# Altium PCB Filter-5.PcbDoc
Units mil, origin at the board's own origin, x right, y up, seen from the top; angles counter-clockwise.
Board outline 2425 x 1230 mil, 2 copper layers (Top Layer, Bottom Layer); 4 components, 3 nets, 8 pads, 1 vias.
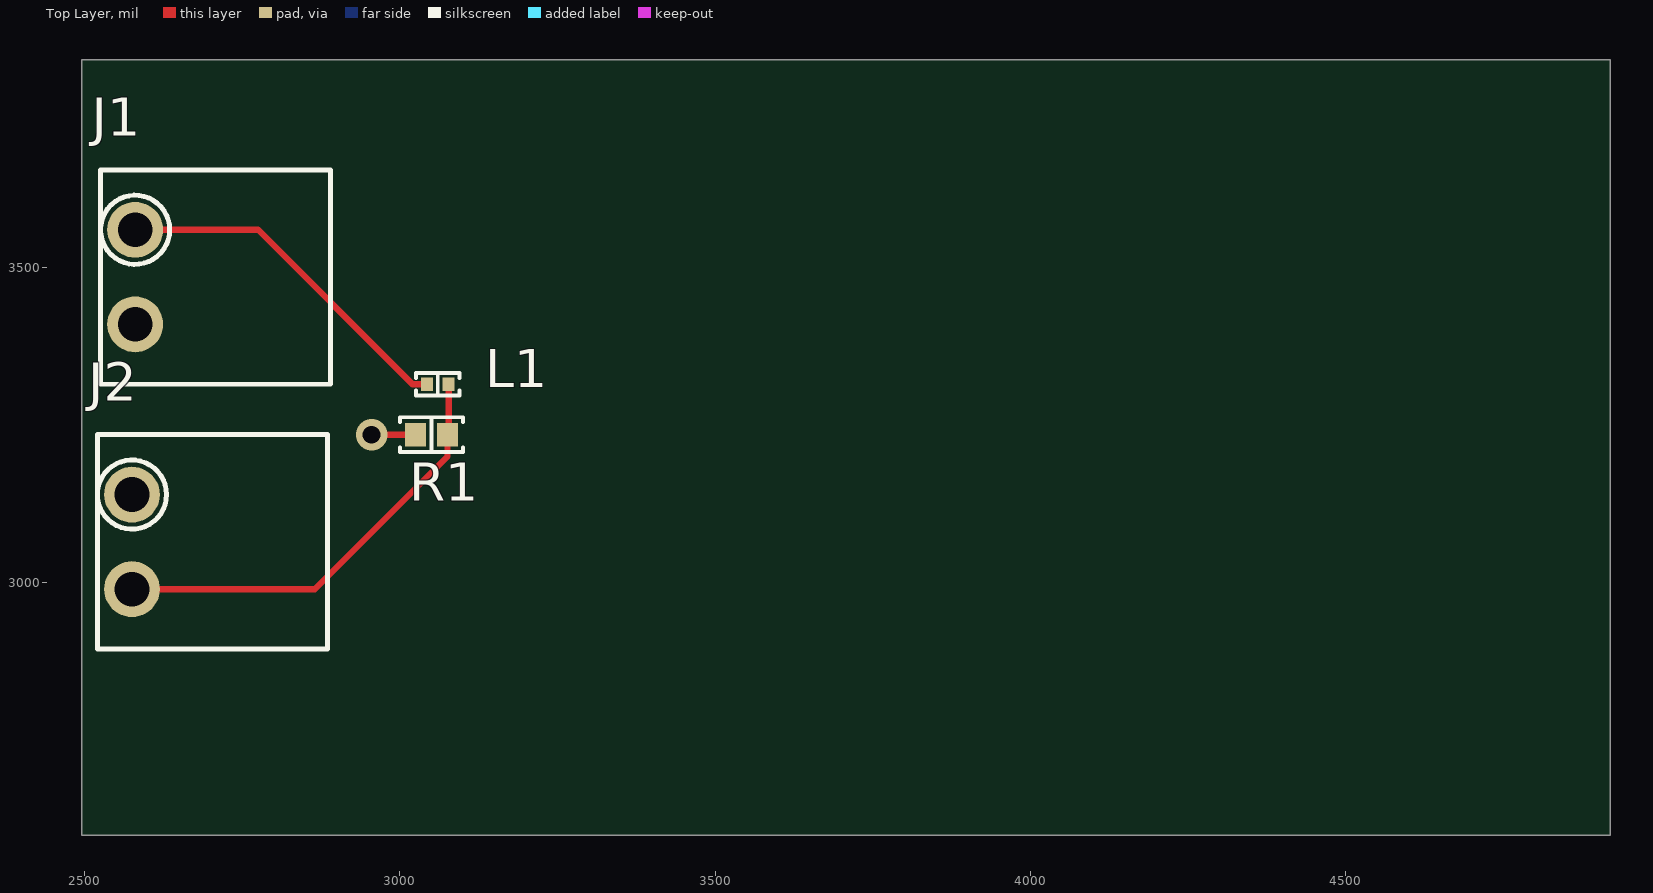
[diagram p0: Top Layer view]
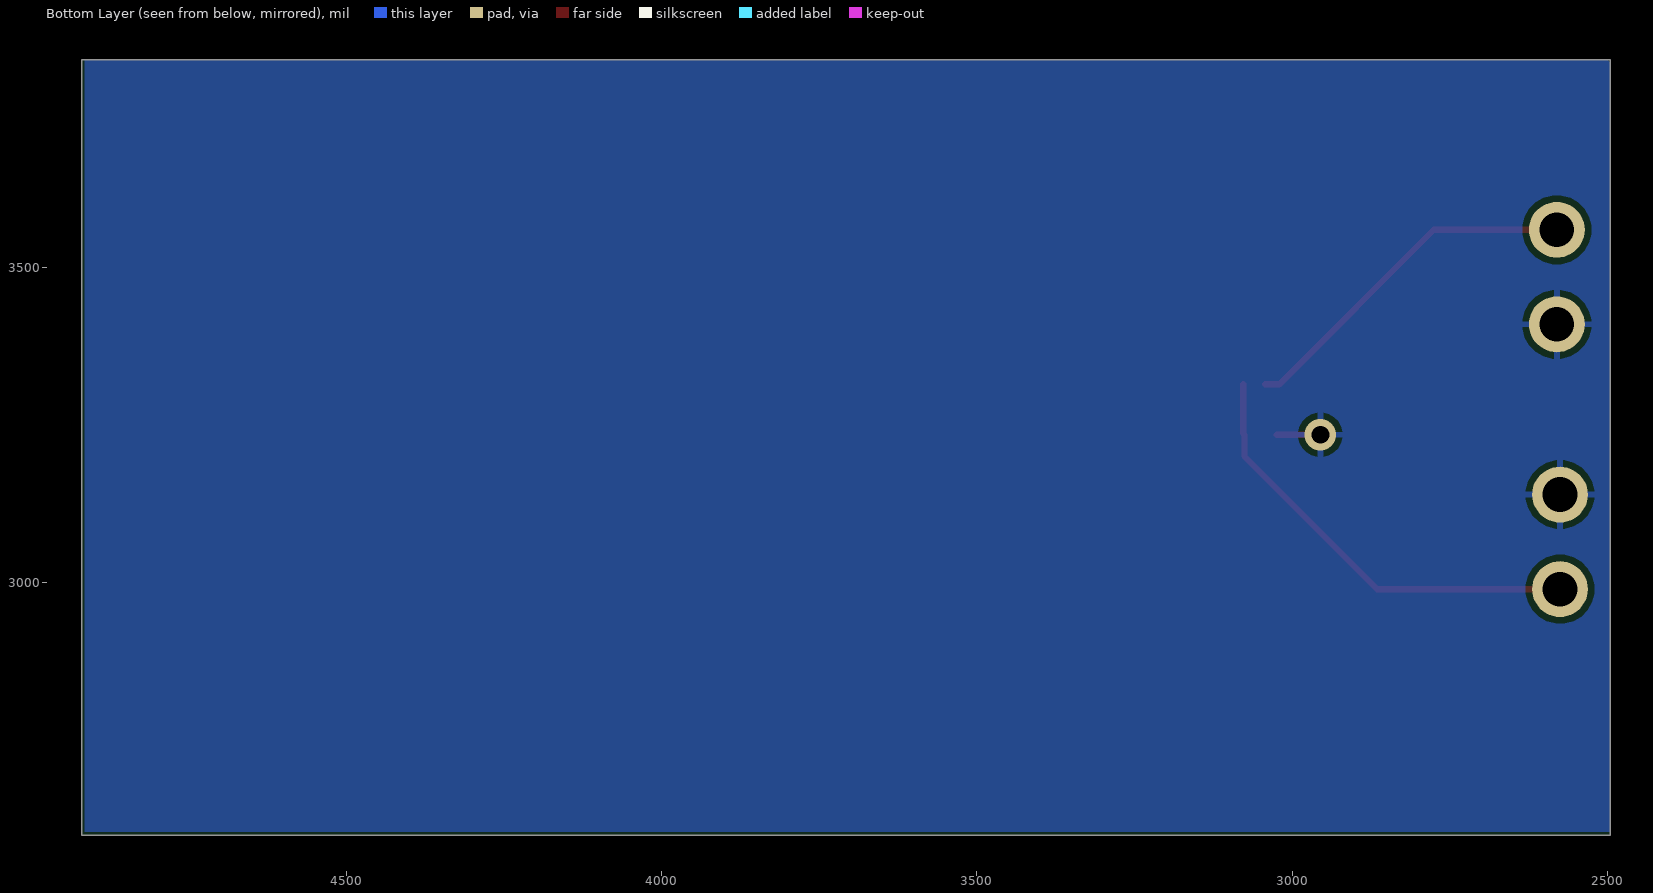
[diagram p1: Bottom Layer view, seen from below]
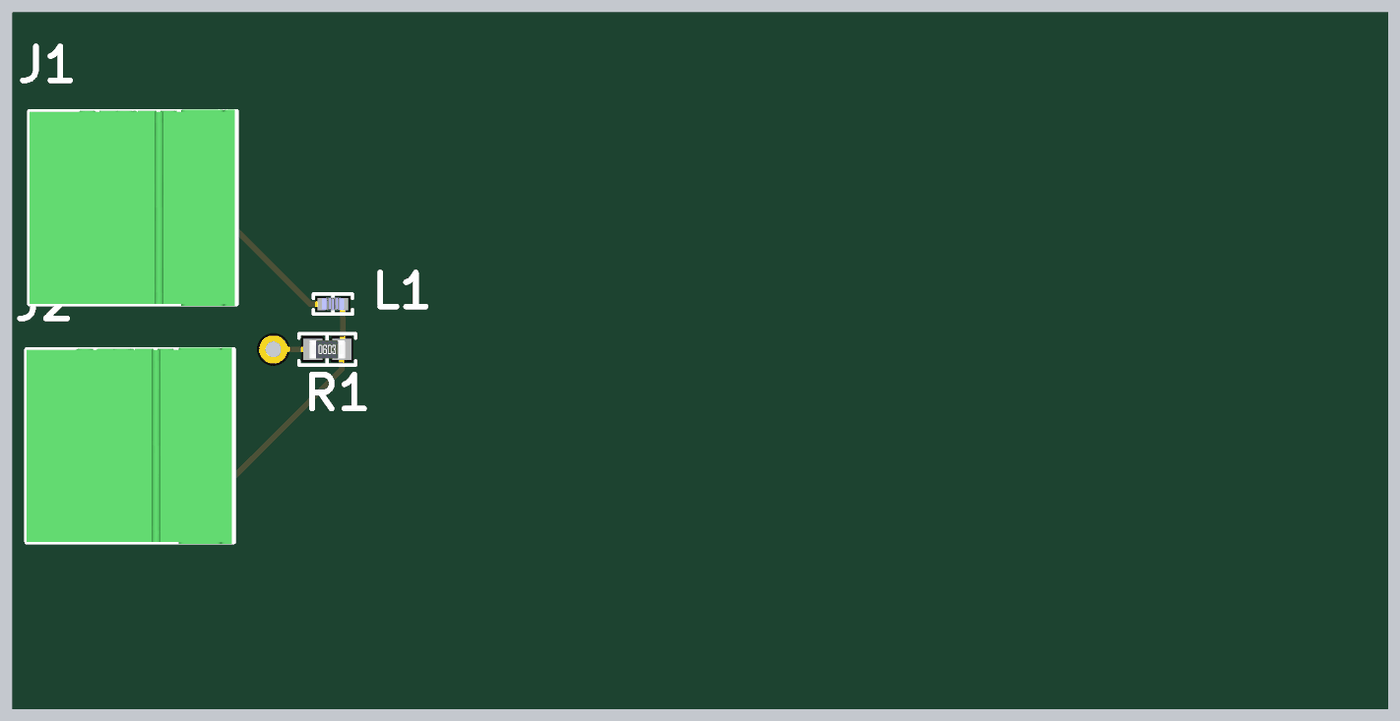
[diagram p2: 3D render of the assembled board from above, using the file's embedded part models]

## Layer stack, top to bottom
Top Solder: solder mask 0.4, Solder Resist, Dk 3.5
Top Layer: signal copper 1.4
Dielectric 1: dielectric 12.6, FR-4, Dk 4.8
Bottom Layer: signal copper 1.4
Bottom Solder: solder mask 0.4, Solder Resist, Dk 3.5

## Board outline
2495,2600 4920,2600 4920,3830 2495,3830

## Design rules (kind name [scope] priority, off if disabled: settings)
Clearance [All] p1: gap=10 ignorepadtopadclearanceinfootprint=FALSE except(0: Arc-Hole Track-Hole SMDPad-Hole THPad-Hole Via-Hole Fill-Hole Poly-Hole Region-Hole Text-Hole)
PolygonConnect [All] p1: connectstyle=Relief reliefconductorwidth=10 reliefentries=4 polygonreliefangle="90 Angle" airgapwidth=10
RoutingVias [All] p1: holewidth=28 width=50 viastyle="Through Hole" minholewidth=28 minwidth=50 maxholewidth=28 maxwidth=50
SolderMaskExpansion [All] p1: expansion=4 istentingtop=FALSE
Width [All] p1: maxlimit=10 minlimit=10 preferedwidth=10
30 further rules are at their usual default settings.

## Components (designator, comment, footprint, x,y, rotation, side; value= is the part's Value field where it differs from the comment)
J1 "OQ0232510000G" "FCI 06-381-2PIN" 2710,3485 r270 top
J2 "OQ0232510000G" "FCI 06-381-2PIN" 2705,3065 r270 top
L1 "160 nH" "IND 0402_1005 RF WW" 3060,3315 r0 top
R1 "10 kOhms" "RES 0603_1608" 3050,3235 r0 top

## Footprints (in the part's own frame and the unit in brackets; to place one, negate y for a bottom-side part, rotate by r counter-clockwise, add the part's x,y. Pads: shape width x height; smd on the part's side, far side on the other; paste and mask are expansions set on the pad)
"FCI 06-381-2PIN" [mm] "FCI Pluggable Terminal Block"
  round 2.25 hole 1.4: 1(-1.905,-3.302) 2(1.905,-3.302)
  silkscreen extent -4.32,-4.7 4.32,4.57, body extent -4.4,-4.7 4.4,4.5, height 7.6
"IND 0402_1005 RF WW" [mm] "Chip Inductor, 2-Leads, Body 1.00x0.50mm, IPC High Density"
  rect 0.48x0.54 smd: 1(-0.44,0) 2(0.44,0)
  silkscreen extent -0.87,-0.45 0.87,0.45, body extent -0.5,-0.29 0.5,0.29, height 0.51
"RES 0603_1608" [mm] "Chip Resistor, 2-Leads, Body 1.60x0.80mm, IPC Medium Density"
  rect 0.85x0.95 smd: 1(-0.65,0) 2(0.65,0)
  silkscreen extent -1.27,-0.7 1.27,0.7, body extent -0.8,-0.4 0.8,0.4, height 0.45

## Part data
J1 J2: "TERM BLOCK HDR 2POS 90DEG 3.81MM", Color=Green, Current - UL=10A, Manufacturer="Amphenol Anytek", Operating Temperature="-40°C ~ 115°C", Supplier Part Number 1=609-3819-ND, Voltage - UL=300V, ComponentLink1Description=Datasheet, ComponentLink1URL=http://portal.fciconnect.com/Comergent//fci/drawing/oqxx32x100j0g.pdf, ComponentLink2Description="DigiKey Link", ComponentLink2URL=//digikey.com/product-detail/en/amphenol-anytek/OQ0232510000G/609-3819-ND/2261255, Contact Mating Finish=Tin, Header Orientation="90°, Right Angle", lastupdated="16/12/2019 19:14:30", Lifecycle Status=0, Minimum Order=1, Mounting Type="Through Hole", Number of Levels=1, Number of Positions=2, Packaging=Bulk, Part Number=OQ0232510000G, Part Status=Active, Pitch="0.150\" (3.81mm)", Positions Per Level=2, price=0.49, Series=06-381, Supplier 1=DigiKey, Termination Style=Solder, Type="Header, Male Pins, Shrouded (4 Side)"
L1: library part LQW15CNR16J00D, "FIXED IND 160NH 480MA 330MOHM SM", Current Rating (Amps)="480 mA", DC Resistance (DCR)="330mOhm Max", Device Package="0402 (1005 Metric)", Frequency - Self Resonant=900MHz, Inductance Frequency - Test="100 MHz", Manufacturer="Murata Electronics", Operating Temperature="-55°C ~ 125°C", Supplier Part Number 1=490-14716-1-ND, Tolerance=±5%, ComponentLink1Description=Datasheet, ComponentLink1URL=https://search.murata.co.jp/Ceramy/image/img/P02/JELF243A-0087.pdf, ComponentLink2Description="DigiKey Link", ComponentLink2URL=https://www.digikey.com/en/products/detail/murata-electronics/LQW15CNR16J00D/4359664, Height - Seated (Max)="0.024\" (0.60mm)", Inductance="160 nH", lastupdated="03/09/2023 20:25:06", Lifecycle Status=Active, Material - Core=Ferrite, Minimum Order=1, Mounting Type="Surface Mount", Package / Case="0402 (1005 Metric)", Packaging=TapeAndReel, Part Number=LQW15CNR16J00D, Part Status=Active, PartId=1, price=0.19, Series=LQW15, Shielding=Unshielded, Size / Dimension="0.039\" L x 0.024\" W (1.00mm x 0.60mm)", Supplier 1=DigiKey, Type="Drum Core, Wirewound"
R1: library part RNCS0603BKE10K0, "RES 10K OHM 0.1% 1/16W 0603", Device Package="0603 (1608 Metric)", Manufacturer="Stackpole Electronics Inc", Operating Temperature="-55°C ~ 155°C", Power (Watts)="0.063W, 1/16W", Ratings=AEC-Q200, Supplier Device Package=0603, Supplier Part Number 1=RNCS0603BKE10K0CT-ND, Temperature Coefficient=±25ppm/°C, Tolerance=±0.1%, ComponentLink1Description=Datasheet, ComponentLink1URL=https://www.seielect.com/catalog/sei-rncs_rnch.pdf, ComponentLink2Description="DigiKey Link", ComponentLink2URL=https://www.digikey.com/en/products/detail/stackpole-electronics-inc/RNCS0603BKE10K0/1708836, Composition="Thin Film", Features="Anti-Corrosive, Automotive AEC-Q200, Moisture Resistant", Height - Seated (Max)="0.022\" (0.55mm)", lastupdated="03/09/2023 19:33:51", Lifecycle Status=Active, Minimum Order=1, Number of Terminations=2, Package / Case="0603 (1608 Metric)", Packaging=TapeAndReel, Part Number=RNCS0603BKE10K0, Part Status=Active, PartId=4838, price=0.06, Resistance="10 kOhms", Series=RNCS, Size / Dimension="0.061\" L x 0.031\" W (1.55mm x 0.80mm)", Supplier 1=DigiKey

## Via types
v1: diameter 50, hole 28, Top Layer to Bottom Layer, 1 vias

## Nets (pads, with @x,y where several pads share a name; then routed paths per layer and width w, separated by ;. In a path a pad name is that pad's centre, name@x,y a point inside that pad or via, vN(x,y) a via of type N, cw(c..) or ccw(c..) an arc to the next point about the centre after c; other vN are vias at no path point)
GND: J1.2 J2.1 R1.1 | length 69.4
  Top Layer w10: v1(2955,3235) R1.1
NetJ1_1: J1.1 L1.1 | length 564.2
  Top Layer w10: J1.1 2775,3560 3020,3315 L1.1
NetJ2_2: J2.2 L1.2 R1.2 | length 702.9
  Top Layer w10: J2.2 2865,2990 3075.59,3200.59 R1.2 3077.32,3236.73 L1.2

## Polygon pours and split planes (outlines as drawn)
GND on Bottom Layer "GND_L02_P000" (solid, pour order 0): 2495,3825 2500,3830 4915,3830 4915,2605 2495,2605